# Altium PCB PWR_GEN_TEMP.PcbDoc
Units mil, origin at the board's own origin, x right, y up, seen from the top; angles counter-clockwise.
Board outline 24500 x 13400 mil, 2 copper layers (Top Layer, Bottom Layer); 103 components, 564 nets, 935 pads, 100 vias.
Unrouted connection lines stored in the file: 343.
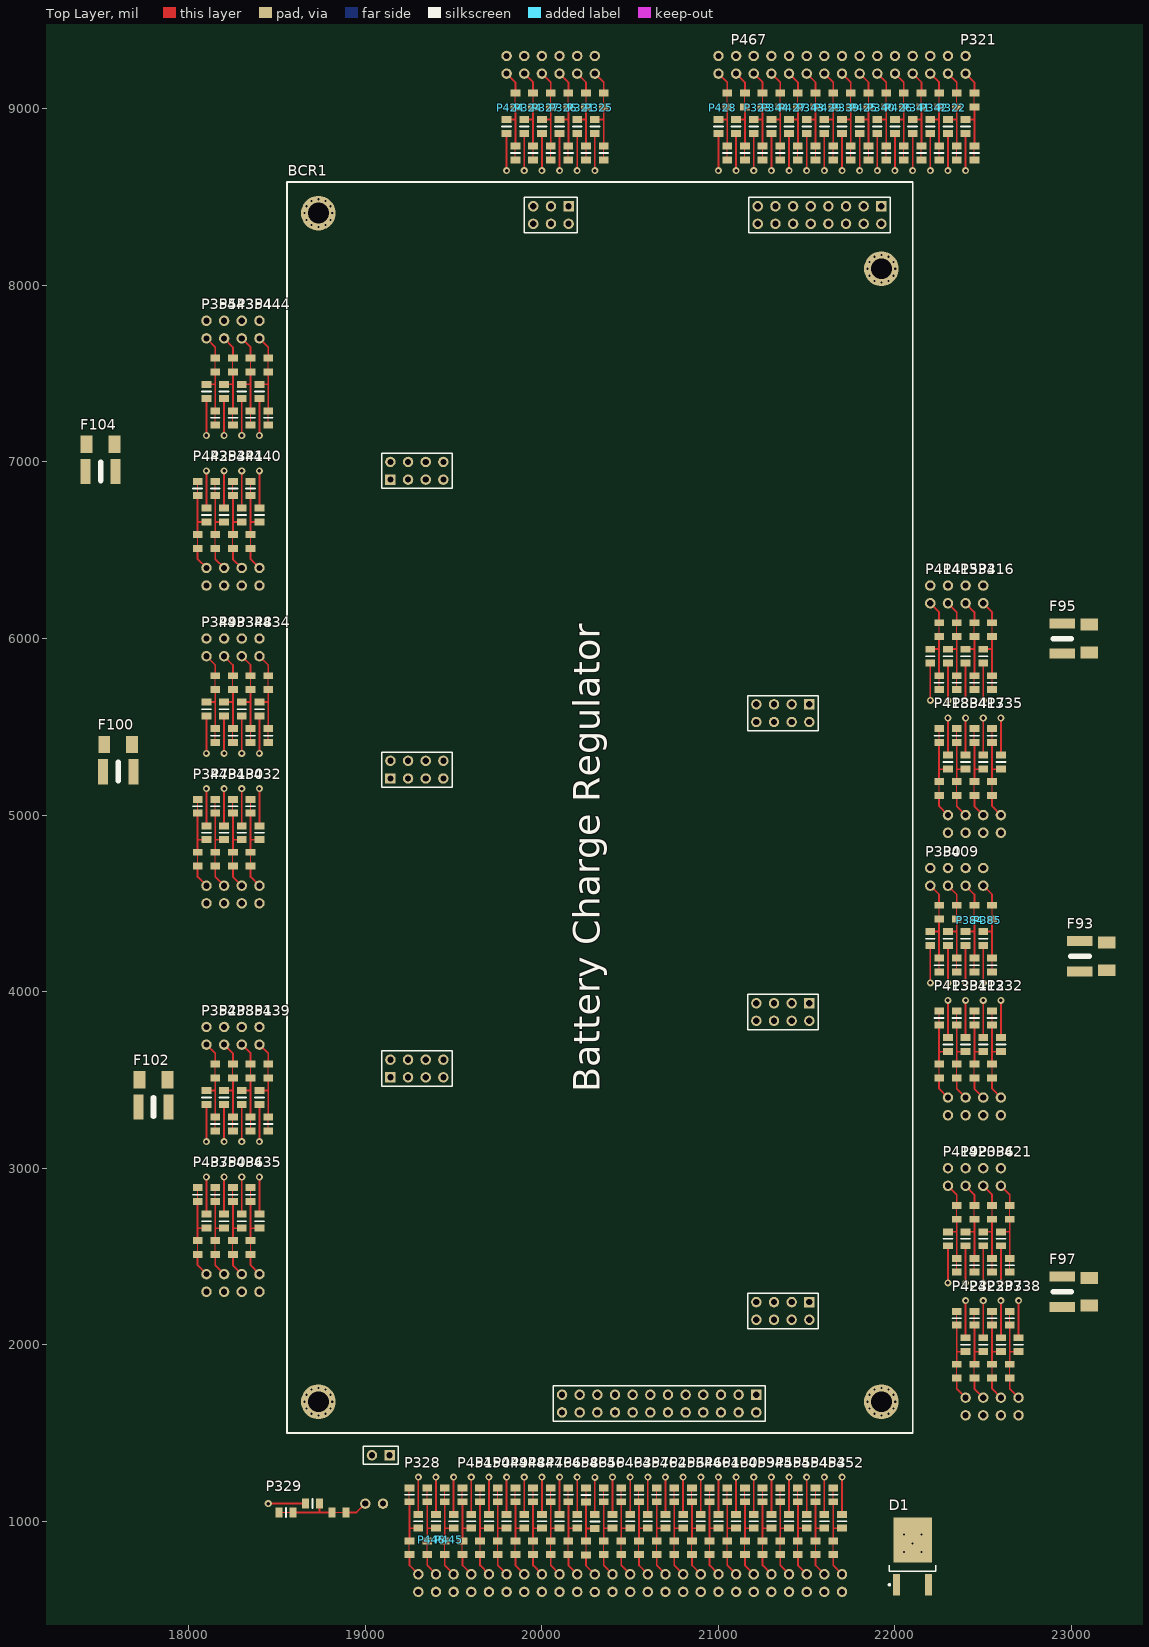
[diagram p0: Top Layer view]
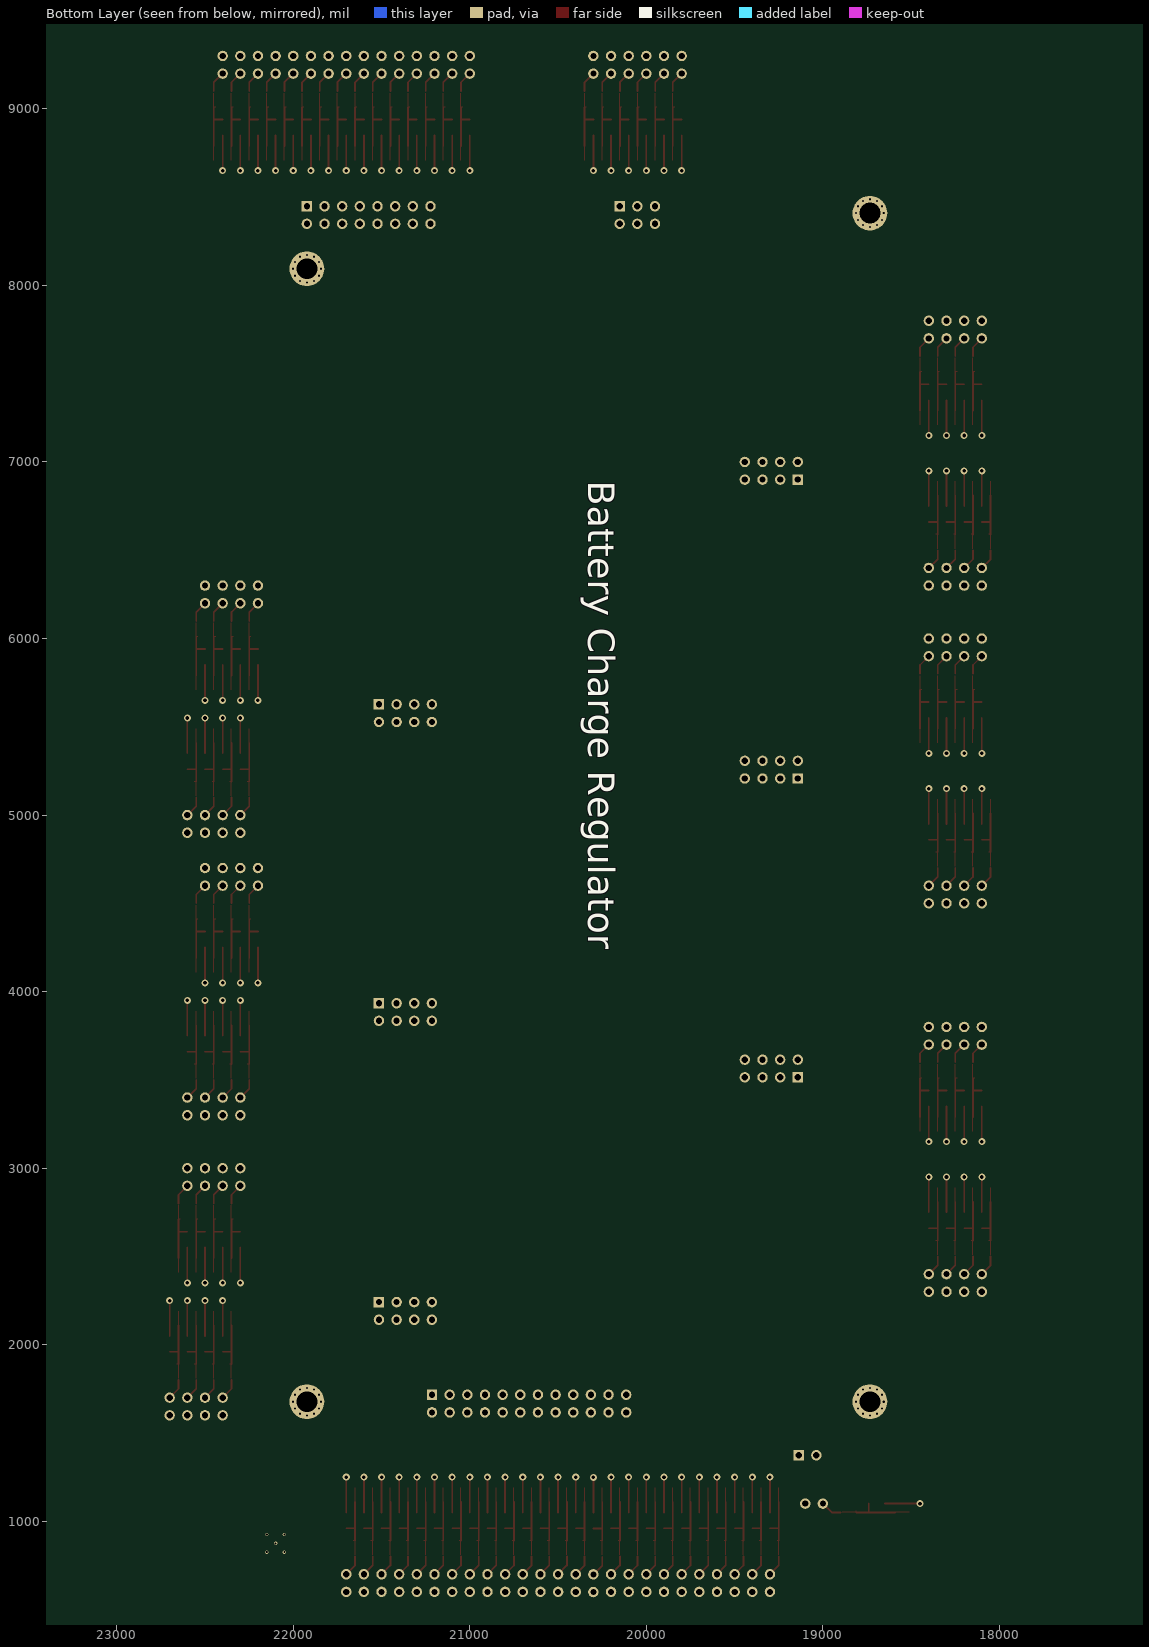
[diagram p1: Bottom Layer view, seen from below]

## Layer stack, top to bottom
Top Layer: signal copper 1.4
Dielectric: dielectric 12.6, FR-4, Dk 4.8
Bottom Layer: signal copper 1.4

## Board outline
0,0 0,13400 24500,13400 24500,0

## Design rules (kind name [scope] priority, off if disabled: settings)
Clearance [All] p1: gap=10
PolygonConnect [All] p1: connectstyle=Relief reliefconductorwidth=10 reliefentries=4 polygonreliefangle="90 Angle"
RoomDefinition PWR_GEN [InComponentClass('PWR_GEN')] p1: confinementstyle=ConfineIn formatcopy=TRUE lockcomponents=FALSE outline 0,0 2000,0 2000,1000 0,1000
RoutingVias [All] p1: holewidth=28 width=50 viastyle="Through Hole" minholewidth=28 minwidth=50 maxholewidth=28 maxwidth=50
SilkscreenOverComponentPads [All] p1: minsilkscreentomaskgap=10
SolderMaskExpansion [All] p1: expansion=4
Width [All] p1: maxlimit=10 minlimit=10 preferedwidth=10
27 further rules are at their usual default settings.

## Components (designator, comment, footprint, x,y, rotation, side; value= is the part's Value field where it differs from the comment)
BCR1 "BCR" BCR 22100,1500 r90 top
D1 "50WQ03FN" TO229P990X238-3N 22100,800 r90 top
F93 "FilterSola" FILTERSOLA 23200,4200 r90 top
F95 "FilterSola" FILTERSOLA 23100,6000 r90 top
F97 "FilterSola" FILTERSOLA 23100,2300 r90 top
F100 "FilterSola" FILTERSOLA 17600,5400 r180 top
F102 "FilterSola" FILTERSOLA 17800,3500 r180 top
F104 "FilterSola" FILTERSOLA 17500,7100 r180 top
P321 "Jumper_Filter" Jumper_filter 20200,9300 r270 top
P321 "Jumper_Filter" Jumper_filter 22400,9300 r270 top
P322 "Jumper_Filter" Jumper_filter 22300,9300 r270 top
P323 "Jumper_Filter" Jumper_filter 21200,9300 r270 top
P324 "Jumper_Filter" Jumper_filter 19900,9300 r270 top
P325 "Jumper_Filter" Jumper_filter 20300,9300 r270 top
P326 "Jumper_Filter" Jumper_filter 20100,9300 r270 top
P327 "Jumper_Filter" Jumper_filter 20000,9300 r270 top
P328 "Jumper_Filter" Jumper_filter 19300,600 r90 top
P329 "Jumper_Filter" Jumper_filter 19100,1100 r180 top
P330 "Jumper_Filter" Jumper_filter 22200,4700 r270 top
P331 "Jumper_Filter" Jumper_filter 22400,3300 r90 top
P332 "Jumper_Filter" Jumper_filter 22600,3300 r90 top
P333 "Jumper_Filter" Jumper_filter 22400,6300 r270 top
P334 "Jumper_Filter" Jumper_filter 22400,4900 r90 top
P335 "Jumper_Filter" Jumper_filter 22600,4900 r90 top
P336 "Jumper_Filter" Jumper_filter 22500,3000 r270 top
P337 "Jumper_Filter" Jumper_filter 22600,1600 r90 top
P338 "Jumper_Filter" Jumper_filter 22700,1600 r90 top
P339 "Jumper_Filter" Jumper_filter 21700,9300 r270 top
P340 "Jumper_Filter" Jumper_filter 21900,9300 r270 top
P341 "Jumper_Filter" Jumper_filter 22100,9300 r270 top
P342 "Jumper_Filter" Jumper_filter 22200,9300 r270 top
P343 "Jumper_Filter" Jumper_filter 21500,9300 r270 top
P344 "Jumper_Filter" Jumper_filter 21300,9300 r270 top
P345 "Jumper_Filter" Jumper_filter 21300,600 r90 top
P346 "Jumper_Filter" Jumper_filter 20900,600 r90 top
P347 "Jumper_Filter" Jumper_filter 18100,4500 r90 top
P348 "Jumper_Filter" Jumper_filter 18300,6000 r270 top
P349 "Jumper_Filter" Jumper_filter 18100,6000 r270 top
P350 "Jumper_Filter" Jumper_filter 18200,2300 r90 top
P351 "Jumper_Filter" Jumper_filter 18300,3800 r270 top
P352 "Jumper_Filter" Jumper_filter 18100,3800 r270 top
P353 "Jumper_Filter" Jumper_filter 18200,6300 r90 top
P354 "Jumper_Filter" Jumper_filter 18300,7800 r270 top
P355 "Jumper_Filter" Jumper_filter 18100,7800 r270 top
P384 "Jumper_Filter" Jumper_filter 22400,4700 r270 top
P385 "Jumper_Filter" Jumper_filter 22500,4700 r270 top
P409 "Jumper_Filter" Jumper_filter 22300,4700 r270 top
P412 "Jumper_Filter" Jumper_filter 22500,3300 r90 top
P413 "Jumper_Filter" Jumper_filter 22300,3300 r90 top
P414 "Jumper_Filter" Jumper_filter 22200,6300 r270 top
P415 "Jumper_Filter" Jumper_filter 22300,6300 r270 top
P416 "Jumper_Filter" Jumper_filter 22500,6300 r270 top
P417 "Jumper_Filter" Jumper_filter 22500,4900 r90 top
P418 "Jumper_Filter" Jumper_filter 22300,4900 r90 top
P419 "Jumper_Filter" Jumper_filter 22300,3000 r270 top
P420 "Jumper_Filter" Jumper_filter 22400,3000 r270 top
P421 "Jumper_Filter" Jumper_filter 22600,3000 r270 top
P422 "Jumper_Filter" Jumper_filter 22500,1600 r90 top
P423 "Jumper_Filter" Jumper_filter 22400,1600 r90 top
P424 "Jumper_Filter" Jumper_filter 19800,9300 r270 top
P425 "Jumper_Filter" Jumper_filter 21800,9300 r270 top
P426 "Jumper_Filter" Jumper_filter 22000,9300 r270 top
P427 "Jumper_Filter" Jumper_filter 21400,9300 r270 top
P428 "Jumper_Filter" Jumper_filter 21000,9300 r270 top
P429 "Jumper_Filter" Jumper_filter 21600,9300 r270 top
P430 "Jumper_Filter" Jumper_filter 18300,4500 r90 top
P431 "Jumper_Filter" Jumper_filter 18200,4500 r90 top
P432 "Jumper_Filter" Jumper_filter 18400,4500 r90 top
P433 "Jumper_Filter" Jumper_filter 18200,6000 r270 top
P434 "Jumper_Filter" Jumper_filter 18400,6000 r270 top
P435 "Jumper_Filter" Jumper_filter 18400,2300 r90 top
P436 "Jumper_Filter" Jumper_filter 18300,2300 r90 top
P437 "Jumper_Filter" Jumper_filter 18100,2300 r90 top
P438 "Jumper_Filter" Jumper_filter 18200,3800 r270 top
P439 "Jumper_Filter" Jumper_filter 18400,3800 r270 top
P440 "Jumper_Filter" Jumper_filter 18400,6300 r90 top
P441 "Jumper_Filter" Jumper_filter 18300,6300 r90 top
P442 "Jumper_Filter" Jumper_filter 18100,6300 r90 top
P443 "Jumper_Filter" Jumper_filter 18200,7800 r270 top
P444 "Jumper_Filter" Jumper_filter 18400,7800 r270 top
P445 "Jumper_Filter" Jumper_filter 19500,600 r90 top
P446 "Jumper_Filter" Jumper_filter 19400,600 r90 top
P447 "Jumper_Filter" Jumper_filter 20000,600 r90 top
P448 "Jumper_Filter" Jumper_filter 19900,600 r90 top
P449 "Jumper_Filter" Jumper_filter 19800,600 r90 top
P450 "Jumper_Filter" Jumper_filter 19700,600 r90 top
P451 "Jumper_Filter" Jumper_filter 19600,600 r90 top
P452 "Jumper_Filter" Jumper_filter 21700,600 r90 top
P453 "Jumper_Filter" Jumper_filter 21600,600 r90 top
P454 "Jumper_Filter" Jumper_filter 21500,600 r90 top
P455 "Jumper_Filter" Jumper_filter 21400,600 r90 top
P456 "Jumper_Filter" Jumper_filter 20800,600 r90 top
P457 "Jumper_Filter" Jumper_filter 20600,600 r90 top
P458 "Jumper_Filter" Jumper_filter 20200,600 r90 top
P459 "Jumper_Filter" Jumper_filter 21200,600 r90 top
P460 "Jumper_Filter" Jumper_filter 21100,600 r90 top
P461 "Jumper_Filter" Jumper_filter 21000,600 r90 top
P462 "Jumper_Filter" Jumper_filter 20700,600 r90 top
P463 "Jumper_Filter" Jumper_filter 20500,600 r90 top
P464 "Jumper_Filter" Jumper_filter 20400,600 r90 top
P465 "Jumper_Filter" Jumper_filter 20300,599 r90 top
P466 "Jumper_Filter" Jumper_filter 20100,600 r90 top
P467 "Jumper_Filter" Jumper_filter 21100,9300 r270 top

## Footprints (in the part's own frame and the unit in brackets; to place one, negate y for a bottom-side part, rotate by r counter-clockwise, add the part's x,y. Pads: shape width x height; smd on the part's side, far side on the other; paste and mask are expansions set on the pad)
BCR [mm]
  round 1.5 hole 0.9: 0(-3.2,77.79) 1(173.96,49.5) 2(173.96,4.5) 3(173.96,54.58) 3(173.96,7.04) 3(173.96,9.58) 3(173.96,12.12) 3(173.96,14.66) 3(173.96,17.2) 3(173.96,19.74) 3(173.96,22.28) 4(176.5,54.58) 4(176.5,22.28) 5(176.5,14.66) 6(176.5,12.12) 7(176.5,9.58) 8(176.5,7.04) 9(176.5,17.2) 10(176.5,19.74) 11(5.5,42.82) 11(5.5,45.36) 11(5.5,47.9) 11(5.5,50.44) 11(5.5,35.2) 11(5.5,37.74) 11(5.5,40.28) 13(5.5,30.12) 13(5.5,32.66) 13(5.5,25.04) 13(5.5,27.58) 14(2.96,50.44) 14(2.96,45.36) 14(2.96,47.9) 14(2.96,40.28) 14(2.96,42.82) 14(2.96,32.66) 14(2.96,35.2) 14(2.96,37.74) 14(2.96,27.58) 14(2.96,30.12) 14(2.96,22.5) 14(2.96,25.04) 15(61.834,17.407) 15(61.834,19.947) 15(61.834,22.487) 16(59.294,17.407) 16(59.294,19.947) 16(59.294,22.487) 17(59.294,14.867) 18(104.834,17.407) 18(104.834,19.947) 18(104.834,22.487) 19(102.294,17.407) 19(102.294,19.947) 19(102.294,22.487) 20(102.294,14.867) 21(18.834,17.407) 21(18.834,19.947) 21(18.834,22.487) 22(16.294,17.407) 22(16.294,19.947) 22(16.294,22.487) 23(16.294,14.867) 24(94.166,67.513) 24(94.166,70.053) 24(94.166,72.593) 25(96.706,67.513) 25(96.706,70.053) 25(96.706,72.593) 26(96.706,75.133) 27(51.166,67.513) 27(51.166,70.053) 27(51.166,72.593) 28(53.706,67.513) 28(53.706,70.053) 28(53.706,72.593) 29(53.706,75.133) 30(137.166,67.513) 30(137.166,70.053) 30(137.166,72.593) 31(139.706,67.513) 31(139.706,70.053) 31(139.706,72.593) 32(139.706,75.133) 34(176.5,52.04) 35(173.96,52.04)
  round 1 hole 0.3: 0(2.5,85.5) 0(2.5,4.5) 0(2.768,86.5) 0(2.768,84.5) 0(2.768,3.5) 0(2.768,5.5) 0(3.5,83.768) 0(3.5,87.232) 0(3.5,6.232) 0(3.5,2.768) 0(4.5,83.5) 0(4.5,87.5) 0(4.5,6.5) 0(4.5,2.5) 0(5.5,83.768) 0(5.5,87.232) 0(5.5,6.232) 0(5.5,2.768) 0(6.232,84.5) 0(6.232,86.5) 0(6.232,3.5) 0(6.232,5.5) 0(6.5,85.5) 0(6.5,4.5) 0(165.5,4.5) 0(165.768,3.5) 0(165.768,5.5) 0(166.5,2.768) 0(166.5,6.232) 0(167.5,2.5) 0(167.5,6.5) 0(168.5,2.768) 0(168.5,6.232) 0(169.232,3.5) 0(169.232,5.5) 0(169.5,4.5) 0(173.5,85.5) 0(173.768,84.5) 0(173.768,86.5) 0(174.5,83.768) 0(174.5,87.232) 0(175.5,83.5) 0(175.5,87.5) 0(176.5,83.768) 0(176.5,87.232) 0(177.232,84.5) 0(177.232,86.5) 0(177.5,85.5)
  round 5 hole 3: 0(4.5,85.5) 0(4.5,4.5) 0(167.5,4.5) 0(175.5,85.5)
  rect 1.5x1.5 hole 0.9: 1(176.5,4.5) 12(-3.2,75.25) 13(5.5,22.5) 15(61.834,14.867) 18(104.834,14.867) 21(18.834,14.867) 24(94.166,75.133) 27(51.166,75.133) 30(137.166,75.133) 33(176.5,49.5)
  silkscreen extent -4.47,0 180,90
FILTERSOLA [mm]
  rect 1.45x3.65 smd: 1(-2.175,3.9) 2(2.175,3.9)
  rect 1.7x2.5 smd: 2(2,0) 3(-2,0)
  silkscreen extent 0,2.55 0,5.2, body extent -2.45,2.1 2.45,5.7, height 2
Jumper_filter [mm] "Connector; Header; 2 Position"
  round 1.5 hole 0.9: 1(0,0) 2(2.54,0)
  rect 1x1.4 smd: 2(5.35,1.27) 2(7.35,1.27) 2(9.16,0) 2(12.97,1.27) 2(14.97,1.27) 3(11.16,0)
  Top Layer lines w0.152: 7.366,1.016 7.366,1.27 ; 14.986,1.27 5.334,1.27
  Top Layer lines w0.254: 16.51,0 11.43,0 ; 9.144,0 9.144,1.27 ; 2.54,0 3.81,1.27 5.08,1.27 ; 12.954,1.27 7.366,1.27
  silkscreen extent 10.16,-0.65 13.97,1.92, body extent 5.25,-0.65 15.07,1.92, height 0.5
TO229P990X238-3N [mm] "D-PAK, 3-Pads, Body 6.2x6.7mm (max), IPC Medium Density"
  rect 3.05x1 smd: 1(-4.05,-2.29) 1(-4.05,2.29)
  rect 6.5x5.55 smd: 2(2.4,0)
  silkscreen extent -4.17,-3.35 -1.25,3.46, body extent -2.1,-3.37 4.12,3.37, height 2.38

## Part data
D1: library part "D Schottky", "Schottky Diode"

## Via types
v1: diameter 40, hole 20, Top Layer to Bottom Layer, 95 vias
v2: diameter 19.68, hole 11.81, Top Layer to Bottom Layer, tented bottom, 5 vias

## Nets (pads, with @x,y where several pads share a name; then routed paths per layer and width w, separated by ;. In a path a pad name is that pad's centre, name@x,y a point inside that pad or via, vN(x,y) a via of type N, cw(c..) or ccw(c..) an arc to the next point about the centre after c; other vN are vias at no path point)
3V3_AUX: 
3V3_AUX_E\N\: 
3V3_BBONE: 
3V3_COMMS: 
3V3_CSC: 
3V3_PWR: P321.1
3V3_UNREG: 
5V0_AUX: 
5V0_AUX_E\N\: 
5V0_BBONE: 
5V0_BCR: P322.1
5V0_TELEM: 
5V0_UNREG: 
8V0_RX1: 
8V0_RX2: 
AFSK1_DET: 
AFSK1_M0: 
AFSK1_M1: 
AFSK1_RX: 
AFSK1_RXD: 
AFSK1_TX: 
AFSK1_TXD: 
AFSK2_DET: 
AFSK2_M0: 
AFSK2_M1: 
AFSK2_RX: 
AFSK2_RXD: 
AFSK2_TX: 
AFSK2_TXD: 
BBONE_E\N\: 
BBONE_I2C2_SCL: 
BBONE_I2C2_SDA: 
BCR_E\N\: 
BCR_MISO: P326.1
BCR_MOSI: P327.1
BCR_R\S\T\: P324.1 P467.1
BCR_SCK: P325.1
COMMS_E\N\: 
CSC_E\N\: 
CSC_ISP: 
CSC_RST: 
DTMF1Q1: 
DTMF1Q2: 
DTMF1Q3: 
DTMF1Q4: 
DTMF1ST: 
DTMF2Q1: 
DTMF2Q2: 
DTMF2Q3: 
DTMF2Q4: 
DTMF2ST: 
GND: F93.3 F95.3 F97.3 F100.3 F102.3 F104.3 P321.3 P322.3 P323.1 P323.3 P324.3 P325.3 P326.3 P327.3 P328.3 P329.3 P330.3 P331.1 P331.3 P332.3 P333.3 P334.1 P334.3 P335.3 P336.3 P337.1 P337.3 P338.3 P339.3 P340.3 P341.3 P342.3 P343.3 P344.3 P345.3 P346.1 P346.3 P347.3 P348.1 P348.3 P349.3 P350.3 P351.1 P351.3 P352.3 P353.3 P354.1 P354.3 P355.3 P384.3 P385.3 P409.3 P412.1 P412.3 P413.1 P413.3 P414.3 P415.3 P416.3 P417.1 P417.3 P418.1 P418.3 P419.3 P420.3 P421.3 P422.1 P422.3 P423.1 P423.3 P424.1 P424.3 P425.1 P425.3 P426.1 P426.3 P427.1 P427.3 P428.1 P428.3 P429.1 P429.3 P430.3 P431.3 P432.3 P433.1 P433.3 P434.1 P434.3 P435.3 P436.3 P437.3 P438.1 P438.3 P439.1 P439.3 P440.3 P441.3 P442.3 P443.1 P443.3 P444.1 P444.3 P445.3 P446.3 P447.3 P448.3 P449.3 P450.3 P451.3 P452.3 P453.3 P454.3 P455.3 P456.1 P456.3 P457.1 P457.3 P458.1 P458.3 P459.1 P459.3 P460.1 P460.3 P461.1 P461.3 P462.1 P462.3 P463.1 P463.3 P464.1 P464.3 P465.1 P465.3 P466.1 P466.3 P467.3
  other v1: 18450,1100 19300,1250 19400,1250 19500,1250 19600,1250 19700,1250 19800,1250 19900,1250 20000,1250 20200,1250 20800,1250 20900,1250 21000,1250 21100,1250 21200,1250 21300,1250 21400,1250 21500,1250 21600,1250 21700,1250 22400,2250 22500,2250 22600,2250 22700,2250 22300,2350 22400,2350 22500,2350 22600,2350 18100,2950 18200,2950 18300,2950 18400,2950 18100,3150 18200,3150 18300,3150 18400,3150 22300,3950 22400,3950 22500,3950 22600,3950 22200,4050 22300,4050 22400,4050 22500,4050 18100,5150 18200,5150 18300,5150 18400,5150 18100,5350 18200,5350 18300,5350 18400,5350 22300,5550 22400,5550 22500,5550 22200,5650 22300,5650 22500,5650 18100,6950 18200,6950 18300,6950 18400,6950 18100,7150 18200,7150 18300,7150 18400,7150 19800,8650 19900,8650 20000,8650 20100,8650 20200,8650 20300,8650 21000,8650 21100,8650 21200,8650 21300,8650 21400,8650 21500,8650 21600,8650 21700,8650 21800,8650 21900,8650 22000,8650 22100,8650 22200,8650 22300,8650 22400,8650
I2C0_SCL: P340.1
I2C0_SDA: P339.1
I2C1_SCL: 
I2C1_SDA: 
I2C2_SCL: P341.1
I2C2_SCL_5V: 
I2C2_SDA: P342.1
I2C2_SDA_5V: 
NetBBONE1_A01: 
NetBBONE1_A02: 
NetBBONE1_A03: 
NetBBONE1_A04: 
NetBBONE1_A05: 
NetBBONE1_A06: 
NetBBONE1_A07: 
NetBBONE1_A08: 
NetBBONE1_A09: 
NetBBONE1_A10: 
NetBBONE1_A11: 
NetBBONE1_A12: 
NetBBONE1_A13: 
NetBBONE1_A14: 
NetBBONE1_A15: 
NetBBONE1_A16: 
NetBBONE1_A17: 
NetBBONE1_A18: 
NetBBONE1_A19: 
NetBBONE1_A20: 
NetBBONE1_A21: 
NetBBONE1_A22: 
NetBBONE1_A23: 
NetBBONE1_A24: 
NetBBONE1_A25: 
NetBBONE1_A26: 
NetBBONE1_A27: 
NetBBONE1_A28: 
NetBBONE1_A29: 
NetBBONE1_A30: 
NetBBONE1_A31: 
NetBBONE1_A32: 
NetBBONE1_A33: 
NetBBONE1_A34: 
NetBBONE1_A35: 
NetBBONE1_A36: 
NetBBONE1_A37: 
NetBBONE1_A38: 
NetBBONE1_A39: 
NetBBONE1_A40: 
NetBBONE1_A41: 
NetBBONE1_A42: 
NetBBONE1_A43: 
NetBBONE1_A44: 
NetBBONE1_A45: 
NetBBONE1_A46: 
NetBBONE1_B01: 
NetBBONE1_B02: 
NetBBONE1_B03: 
NetBBONE1_B04: 
NetBBONE1_B05: 
NetBBONE1_B06: 
NetBBONE1_B07: 
NetBBONE1_B08: 
NetBBONE1_B09: 
NetBBONE1_B10: 
NetBBONE1_B11: 
NetBBONE1_B12: 
NetBBONE1_B13: 
NetBBONE1_B14: 
NetBBONE1_B15: 
NetBBONE1_B16: 
NetBBONE1_B17: 
NetBBONE1_B18: 
NetBBONE1_B19: 
NetBBONE1_B20: 
NetBBONE1_B21: 
NetBBONE1_B22: 
NetBBONE1_B23: 
NetBBONE1_B24: 
NetBBONE1_B25: 
NetBBONE1_B26: 
NetBBONE1_B27: 
NetBBONE1_B28: 
NetBBONE1_B29: 
NetBBONE1_B30: 
NetBBONE1_B31: 
NetBBONE1_B32: 
NetBBONE1_B33: 
NetBBONE1_B34: 
NetBBONE1_B35: 
NetBBONE1_B36: 
NetBBONE1_B37: 
NetBBONE1_B38: 
NetBBONE1_B39: 
NetBBONE1_B40: 
NetBBONE1_B41: 
NetBBONE1_B42: 
NetBBONE1_B43: 
NetBBONE1_B44: 
NetBBONE1_B45: 
NetBBONE1_B46: 
NetBBONE1_P01: 
NetBBONE1_P02: 
NetBBONE1_P03: 
NetBBONE1_P04: 
NetBBONE1_P05: 
NetBBONE1_P06: 
NetBBONE1_P07: 
NetBBONE1_P08: 
NetBBONE1_P09: 
NetBBONE1_P10: 
NetBCR1_1: BCR1.1 P321.2
NetBCR1_2: BCR1.2 P322.2
NetBCR1_3: BCR1.3 P323.2 P424.2 P425.2 P426.2 P427.2 P428.2 P429.2
NetBCR1_4: BCR1.4 P324.2 P467.2
NetBCR1_5: BCR1.5 P339.2
NetBCR1_6: BCR1.6 P340.2
NetBCR1_7: BCR1.7 P341.2
NetBCR1_8: BCR1.8 P342.2
NetBCR1_9: BCR1.9 P343.2
NetBCR1_10: BCR1.10 P344.2
NetBCR1_11: BCR1.11 P328.2 P445.2 P446.2 P447.2 P448.2 P449.2 P450.2 P451.2
NetBCR1_12: BCR1.12 P329.2
NetBCR1_13: BCR1.13 P345.2 P452.2 P453.2 P454.2 P455.2
NetBCR1_14: BCR1.14 P346.2 P456.2 P457.2 P458.2 P459.2 P460.2 P461.2 P462.2 P463.2 P464.2 P465.2 P466.2
NetBCR1_15: BCR1.15 P330.2 P384.2 P385.2 P409.2
NetBCR1_16: BCR1.16 P331.2 P412.2 P413.2
NetBCR1_17: BCR1.17 P332.2
NetBCR1_18: BCR1.18 P333.2 P414.2 P415.2 P416.2
  other v1: 22400,5650
NetBCR1_19: BCR1.19 P334.2 P417.2 P418.2
NetBCR1_20: BCR1.20 P335.2
NetBCR1_21: BCR1.21 P336.2 P419.2 P420.2 P421.2
NetBCR1_22: BCR1.22 P337.2 P422.2 P423.2
NetBCR1_23: BCR1.23 P338.2
NetBCR1_24: BCR1.24 P347.2 P430.2 P431.2 P432.2
NetBCR1_25: BCR1.25 P348.2 P433.2 P434.2
NetBCR1_26: BCR1.26 P349.2
NetBCR1_27: BCR1.27 P350.2 P435.2 P436.2 P437.2
NetBCR1_28: BCR1.28 P351.2 P438.2 P439.2
NetBCR1_29: BCR1.29 P352.2
NetBCR1_30: BCR1.30 P353.2 P440.2 P441.2 P442.2
NetBCR1_31: BCR1.31 P354.2 P443.2 P444.2
NetBCR1_32: BCR1.32 P355.2
NetBCR1_33: BCR1.33 P325.2
NetBCR1_34: BCR1.34 P326.2
NetBCR1_35: BCR1.35 P327.2
NetC1_2: 
NetCOMMS1_AFSK1_M0: 
NetCOMMS1_AFSK1_M1: 
NetCOMMS1_AFSK1_RXD: 
NetCOMMS1_AFSK1_TXD: 
NetCOMMS1_AFSK2_M0: 
NetCOMMS1_AFSK2_M1: 
NetCOMMS1_AFSK2_RXD: 
NetCOMMS1_AFSK2_TXD: 
NetCOMMS1_DTMF1_ES: 
NetCOMMS1_DTMF1_Q1: 
NetCOMMS1_DTMF1_Q2: 
NetCOMMS1_DTMF1_Q3: 
NetCOMMS1_DTMF1_Q4: 
NetCOMMS1_DTMF1_ST: 
NetCOMMS1_DTMF2_ES: 
NetCOMMS1_DTMF2_Q1: 
NetCOMMS1_DTMF2_Q2: 
NetCOMMS1_DTMF2_Q3: 
NetCOMMS1_DTMF2_Q4: 
NetCOMMS1_DTMF2_ST: 
NetCOMMS1_GMSK_RX1: 
NetCOMMS1_GMSK_RX2: 
NetCOMMS1_GMSK_TX1: 
NetCOMMS1_GMSK_TX2: 
NetCOMMS1_GND: 
NetCOMMS1_RX1: 
NetCOMMS1_RX2: 
NetCOMMS1_S0: 
NetCOMMS1_S1: 
NetCOMMS1_S2: 
NetCOMMS1_S3: 
NetCOMMS1_S4: 
NetCOMMS1_S5: 
NetCOMMS1_S6: 
NetCOMMS1_S7: 
NetCOMMS1_TX1: 
NetCOMMS1_TX2: 
NetCOMMS1_VCC: 
NetCSC1_C1_1: 
NetCSC1_C1_2: 
NetCSC1_C1_3: 
NetCSC1_C1_4: 
NetCSC1_C1_5: 
NetCSC1_C1_6: 
NetCSC1_C1_7: 
NetCSC1_C1_8: 
NetCSC1_C1_9: 
NetCSC1_C1_10: 
NetCSC1_C1_11: 
NetCSC1_C1_12: 
NetCSC1_C1_13: 
NetCSC1_C1_14: 
NetCSC1_C1_15: 
NetCSC1_C1_16: 
NetCSC1_C1_17: 
NetCSC1_C1_18: 
NetCSC1_C1_19: 
NetCSC1_C1_20: 
NetCSC1_C1_21: 
NetCSC1_C1_22: 
NetCSC1_C1_23: 
NetCSC1_C1_24: 
NetCSC1_C1_25: 
NetCSC1_C1_26: 
NetCSC1_C1_27: 
NetCSC1_C1_28: 
NetCSC1_C1_29: 
NetCSC1_C1_30: 
NetCSC1_C1_31: 
NetCSC1_C1_32: 
NetCSC1_C1_33: 
NetCSC1_C1_34: 
NetCSC1_C1_35: 
NetCSC1_C1_36: 
NetCSC1_C1_37: 
NetCSC1_C1_38: 
NetCSC1_C1_39: 
NetCSC1_C1_40: 
NetCSC1_C2_1: 
NetCSC1_C2_2: 
NetCSC1_C2_3: 
NetCSC1_C2_4: 
NetCSC1_C2_5: 
NetCSC1_C2_6: 
NetCSC1_C2_7: 
NetCSC1_C2_8: 
NetCSC1_C2_9: 
NetCSC1_C2_10: 
NetCSC1_C2_11: 
NetCSC1_C2_12: 
NetCSC1_C2_13: 
NetCSC1_C2_14: 
NetCSC1_C2_15: 
NetCSC1_C2_16: 
NetCSC1_C2_17: 
NetCSC1_C2_18: 
NetCSC1_C2_19: 
NetCSC1_C2_20: 
NetCSC1_C2_21: 
NetCSC1_C2_22: 
NetCSC1_C2_23: 
NetCSC1_C2_24: 
NetCSC1_C2_25: 
NetCSC1_C2_26: 
NetCSC1_C2_27: 
NetCSC1_C2_28: 
NetCSC1_C2_29: 
NetCSC1_C2_30: 
NetCSC1_C2_31: 
NetCSC1_C2_32: 
NetCSC1_C2_33: 
NetCSC1_C2_34: 
NetCSC1_C2_35: 
NetCSC1_C2_36: 
NetCSC1_C2_37: 
NetCSC1_C2_38: 
NetCSC1_C2_39: 
NetCSC1_C2_40: 
NetCSC1_C3_1: 
NetCSC1_C3_2: 
NetCSC1_C3_3: 
NetCSC1_C3_4: 
NetCSC1_C3_5: 
NetCSC1_C3_6: 
NetCSC1_C3_7: 
NetCSC1_C3_8: 
NetCSC1_C3_9: 
NetCSC1_C3_10: 
NetCSC1_C3_11: 
NetCSC1_C3_12: 
NetCSC1_C3_13: 
NetCSC1_C3_14: 
NetCSC1_C3_15: 
NetCSC1_C3_16: 
NetCSC1_C3_17: 
NetCSC1_C3_18: 
NetCSC1_C3_19: 
NetCSC1_C3_20: 
NetCSC1_C3_21: 
NetCSC1_C3_22: 
NetCSC1_C3_23: 
NetCSC1_C3_24: 
NetCSC1_C3_25: 
NetCSC1_C3_26: 
NetCSC1_C3_27: 
NetCSC1_C3_28: 
NetCSC1_C3_29: 
NetCSC1_C3_30: 
NetCSC1_C3_31: 
NetCSC1_C3_32: 
NetCSC1_C3_33: 
NetCSC1_C3_34: 
NetCSC1_C3_35: 
NetCSC1_C3_36: 
NetCSC1_C3_37: 
NetCSC1_C3_38: 
NetCSC1_C3_39: 
NetCSC1_C3_40: 
NetCSC1_GND: 
NetCSC1_ISP1: 
NetCSC1_ISP2: 
NetCSC1_ISP3: 
NetCSC1_ISP4: 
NetCSC1_ISP5: 
NetCSC1_ISP6: 
NetD1_1: D1.1 P345.1 P452.1 P453.1 P454.1 P455.1
NetF50_2: 
NetF51_2: 
NetF52_2: 
NetF53_2: 
NetF54_2: 
NetF55_2: 
NetF56_2: 
NetF57_2: 
NetF58_2: 
NetF59_1: 
NetF60_1: 
NetF61_2: 
NetF62_2: 
NetF93_2: F93.2 P330.1 P384.1 P385.1 P409.1
NetF95_2: F95.2 P333.1 P414.1 P415.1 P416.1
NetF97_2: F97.2 P336.1 P419.1 P420.1 P421.1
NetF100_2: F100.2 P347.1 P430.1 P431.1 P432.1
NetF102_2: F102.2 P350.1 P435.1 P436.1 P437.1
NetF104_2: F104.2 P353.1 P440.1 P441.1 P442.1
NetF106_1: 
NetF106_2: 
NetF107_1: 
NetF107_2: 
NetF108_1: 
NetF108_2: 
NetF109_1: 
NetF109_2: 
NetF110_1: 
NetF110_2: 
NetF111_1: 
NetF111_2: 
NetF112_1: 
NetF112_2: 
NetF113_1: 
NetF113_2: 
NetF114_1: 
NetF114_2: 
NetF115_1: 
NetF115_2: 
NetF116_1: 
NetF116_2: 
NetF117_1: 
NetF117_2: 
NetGMSK1_1A: 
NetGMSK1_1B: 
NetGMSK1_1C: 
NetGMSK1_2A: 
NetGMSK1_2B: 
NetGMSK1_2C: 
NetGMSK1_3A: 
NetGMSK1_3B: 
NetGMSK1_3C: 
NetGMSK1_4A: 
NetGMSK1_4B: 
NetGMSK1_5A: 
NetGMSK1_5B: 
NetGMSK1_5C: 
NetGMSK1_6A: 
NetGMSK1_6B: 
NetGMSK1_7A: 
NetGMSK1_7B: 
NetGMSK1_7C: 
NetGMSK1_8A: 
NetGMSK1_8B: 
NetGMSK1_8C: 
NetGMSK1_9A: 
NetGMSK1_9B: 
NetGMSK1_10A: 
NetGMSK1_10B: 
NetGMSK1_12A: 
NetGMSK1_12B: 
NetJ15_1: 
NetJ15_2: 
NetJ15_3: 
NetJ15_4: 
NetJ15_5: 
NetJ15_6: 
NetJ15_7: 
NetJ15_8: 
NetJ15_9: 
NetJ16_1: 
NetJ16_2: 
NetJ16_3: 
NetJ16_4: 
NetJ16_5: 
NetJ16_6: 
NetJ16_7: 
NetJ16_8: 
NetJ16_9: 
NetJ25_2: 
NetJ26_2: 
NetLDO1_EN1: 
NetLDO1_EN2: 
NetLDO1_EN3: 
NetLDO1_EN4: 
NetLDO1_GND: 
NetLDO1_RST1: 
NetLDO1_RST2: 
NetLDO1_RST3: 
NetLDO1_RST4: 
NetLDO1_VIN: 
NetLDO1_VOUT1: 
NetLDO1_VOUT2: 
NetLDO1_VOUT3: 
NetLDO1_VOUT4: 
NetLDO2_EN1: 
NetLDO2_EN2: 
NetLDO2_EN3: 
NetLDO2_EN4: 
NetLDO2_GND: 
NetLDO2_RST1: 
NetLDO2_RST2: 
NetLDO2_RST3: 
NetLDO2_RST4: 
NetLDO2_VIN: 
NetLDO2_VOUT1: 
NetLDO2_VOUT2: 
NetLDO2_VOUT3: 
NetLDO2_VOUT4: 
NetP234_2: 
NetP273_2: 
NetP275_2: 
NetP276_2: 
NetP297_1: 
NetP298_1: 
NetP299_1: 
NetP300_1: 
NetP358_2: 
NetP359_2: 
NetP362_2: 
NetP363_2: 
NetP365_2: 
NetP366_2: 
NetP368_2: 
NetP369_2: 
NetP372_1: 
NetP375_1: 
NetP377_1: 
NetP378_1: 
NetP380_1: 
NetP381_1: 
PLLACQ1: 
PLLACQ2: 
PWR_E\N\: 
RX1_AF: 
RX1_GMSK: 
RX2_AF: 
RX2_GMSK: 
RX_PSAVE1: 
RX_PSAVE2: 
RX_S/N1: 
RX_S/N2: 
RXACQ1: 
RXACQ2: 
RXCLK1: 
RXCLK2: 
RXDATA1: 
RXDATA2: 
RXHOLD1: 
RXHOLD2: 
S0: 
S1: 
S2: 
S3: 
S4: 
S5: 
S6: 
S7: 
SOLA_X+_T: P332.1
SOLA_X+_V: F93.1
SOLA_X-_T: P349.1
SOLA_X-_V: F100.1
SOLA_Y+_T: P335.1
SOLA_Y+_V: F95.1
SOLA_Y-_T: P352.1
SOLA_Y-_V: F102.1
SOLA_Z+_T: P338.1
SOLA_Z+_V: F97.1
SOLA_Z-_T: P355.1
SOLA_Z-_V: F104.1
TBATT: P329.1
TELEM_E\N\: 
TX1_AF: 
TX1_GMSK: 
TX2_AF: 
TX2_GMSK: 
TX_PSAVE1: 
TX_PSAVE2: 
TXCLK1: 
TXCLK2: 
TXDATA1: 
TXDATA2: 
TXEN1: 
TXEN2: 
UART0_RX: 
UART0_TX: 
V_BATT: P328.1 P445.1 P446.1 P447.1 P448.1 P449.1 P450.1 P451.1
V_LOAD: D1.2
  other v2: 22050,825 22150,825 22100,875 22050,925 22150,925
VVAR_TX1: 
VVAR_TX2: 
pads on no net: BCR1.0 P343.1 P344.1
copper on no net:
  other v1: 20300,1249 20100,1250 20400,1250 20500,1250 20600,1250 20700,1250 22600,5550

## Text inside footprints (layer, text, board x,y; h text height)
BCR1: Top Overlay "Battery Charge Regulator" at 20328.35,3429.13 h150 r90; Bottom Overlay "Battery Charge Regulator" at 20328.35,6893.7 h150 r90